# Altium PCB M2 PCB TX-RX.PcbDoc
Units mm, origin at the board's own origin, x right, y up, seen from the top; angles counter-clockwise.
Board outline 38.48 x 38.35 mm, 2 copper layers (Top Layer, Bottom Layer); 8 components, 8 nets, 26 pads, 0 vias.
Unrouted connection lines stored in the file: 2.
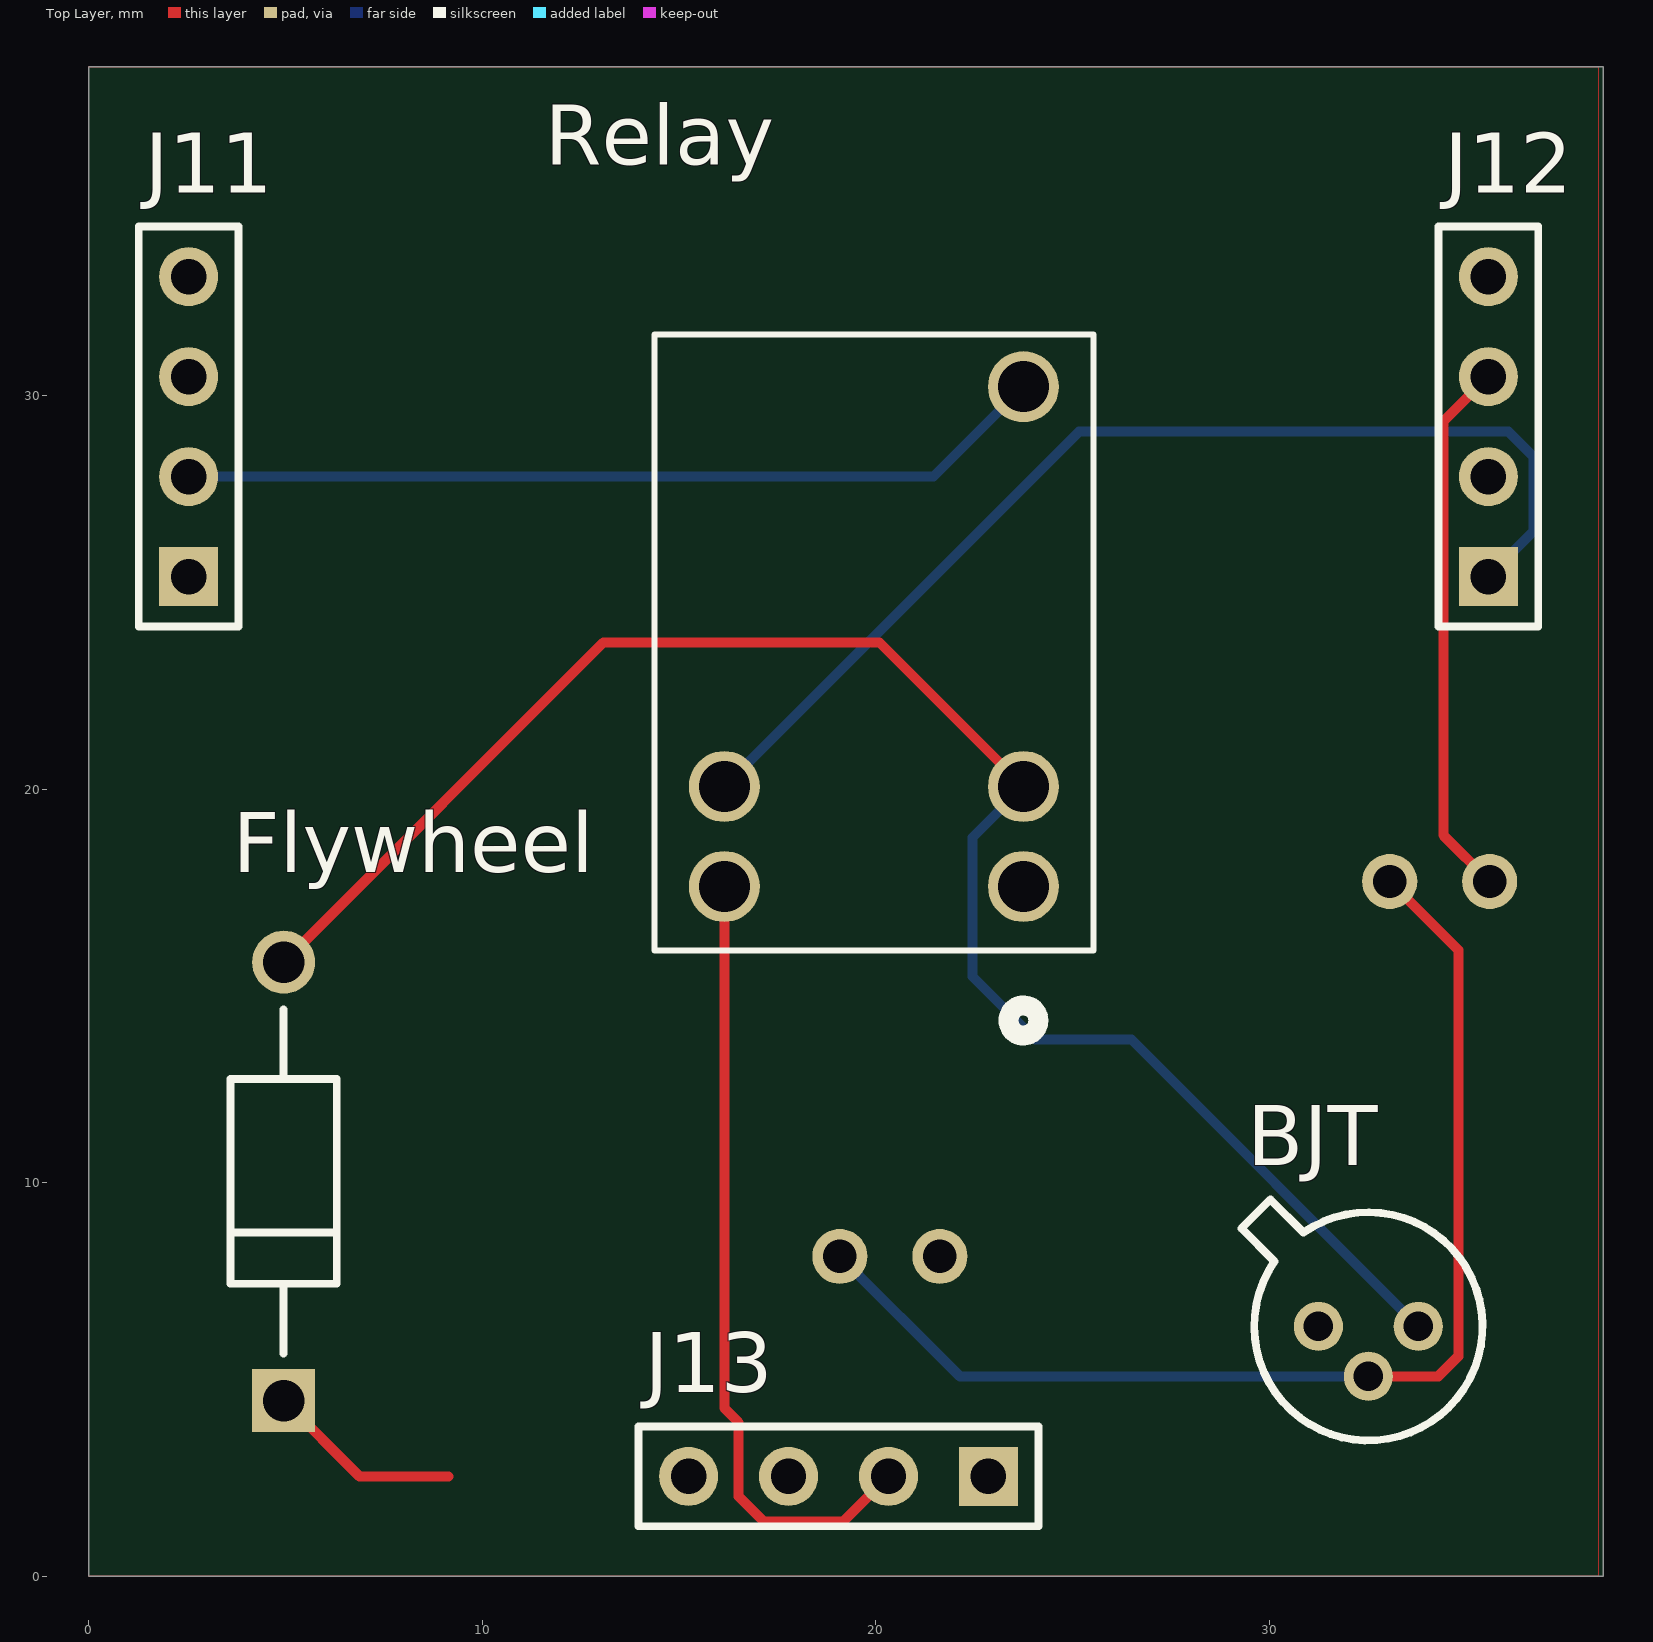
[diagram p0: Top Layer view]
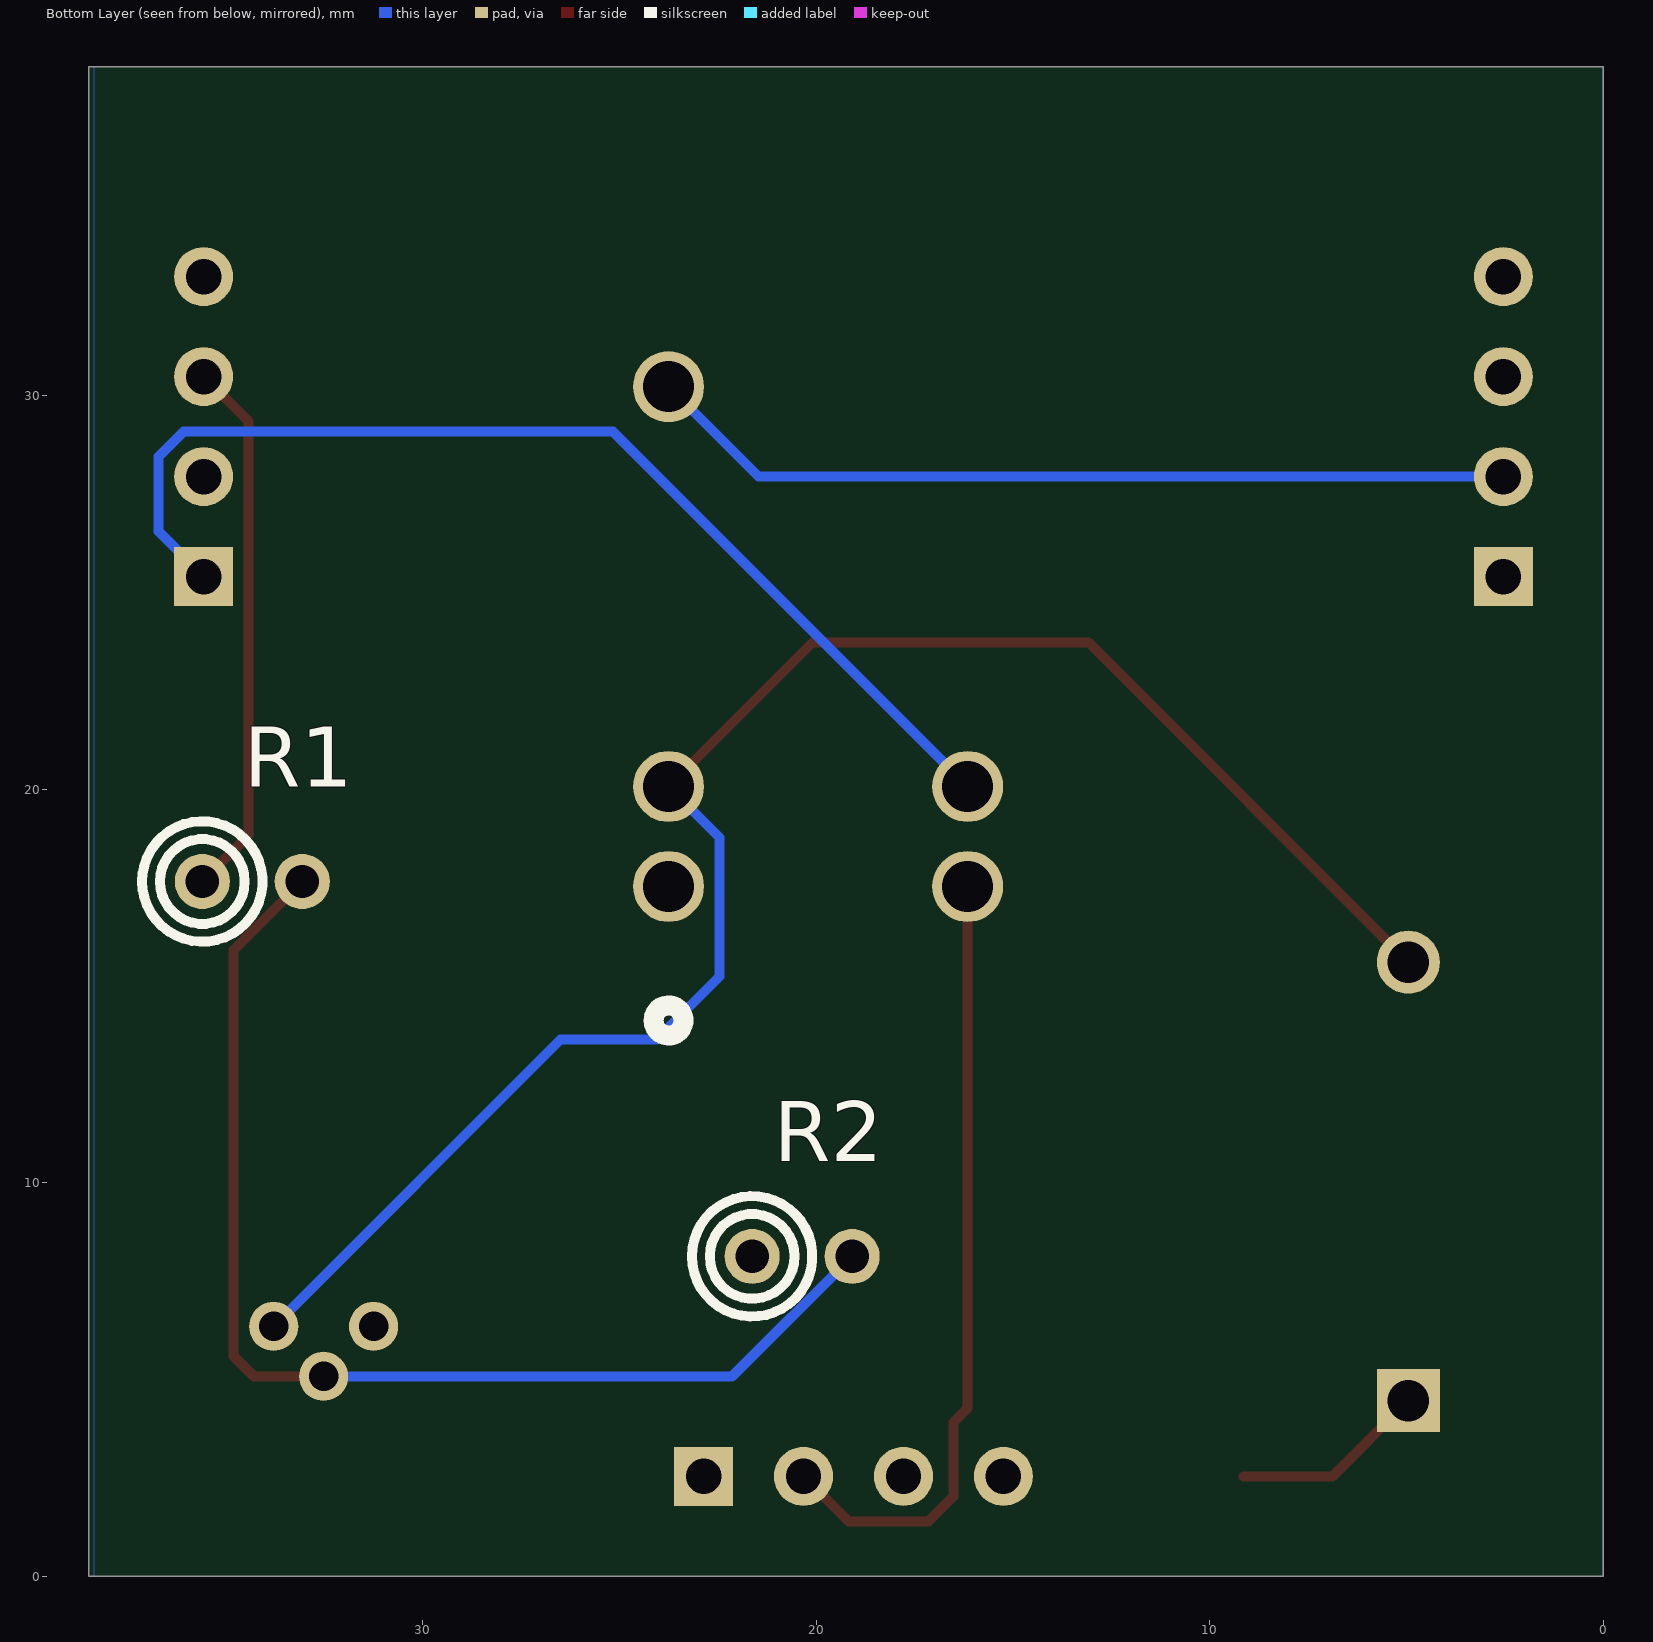
[diagram p1: Bottom Layer view, seen from below]

## Layer stack, top to bottom
Top Solder: solder mask 0.0102, Solder Resist, Dk 3.5
Top Layer: signal copper 0.0356
Dielectric 1: dielectric 0.32, FR-4, Dk 4.8
Bottom Layer: signal copper 0.0356
Bottom Solder: solder mask 0.0102, Solder Resist, Dk 3.5

## Board outline
0,0 38.481,0 38.481,38.354 0,38.354

## Design rules (kind name [scope] priority, off if disabled: settings)
Clearance [All] p1: gap=0.254 ignorepadtopadclearanceinfootprint=FALSE except(0: Arc-Hole Track-Hole SMDPad-Hole THPad-Hole Via-Hole Fill-Hole Poly-Hole Region-Hole Text-Hole)
HoleSize [All] p1: absolutevalues=TRUE maxlimit=22.86 minlimit=0.305 maxpercent=80.000 minpercent=20.000
MinimumSolderMaskSliver [All] p1: minsoldermaskwidth=0.025
PolygonConnect [All] p1: connectstyle=Relief reliefconductorwidth=0.254 reliefentries=4 polygonreliefangle="90 Angle" airgapwidth=0.254
RoutingVias [All] p1: holewidth=0.305 width=0.61 viastyle="Through Hole" minholewidth=0.305 minwidth=0.61 maxholewidth=2.54 maxwidth=5.08
SilkToSilkClearance [All] p1: silktosilkclearance=0
SilkToSolderMaskClearance [IsPad] p1: minsilkscreentomaskgap=0.025 clearancetoexposedcopper=TRUE
SolderMaskExpansion [All] p1: expansion=0.102 istentingtop=FALSE
Width [All] p1: maxlimit=5.08 minlimit=0.254 preferedwidth=0.254
26 further rules are at their usual default settings.

## Components (designator, comment, footprint, x,y, rotation, side; value= is the part's Value field where it differs from the comment)
BJT "2N2222A" STM-TO-18-3 32.512,6.35 r0 top
Flywheel "1N4001-TP" FP-DO-41-MFG 4.953,10.033 r90 top value=15pF
J11 "Header 4" HDR1X4 2.54,25.4 r90 top locked
J12 "Header 4" HDR1X4 35.56,25.4 r90 top locked
J13 "Header 4" HDR1X4 22.86,2.54 r180 top locked
R1 "Res1" AXIAL-0.1-RES 34.324,17.653 r180 bottom value=1K
R2 "Res1" AXIAL-0.1-RES 20.354,8.128 r180 bottom value=10K
Relay "7-1393779-2" RELAY_7-1393779-2 23.749,17.526 r90 top

## Footprints (in the part's own frame and the unit in brackets; to place one, negate y for a bottom-side part, rotate by r counter-clockwise, add the part's x,y. Pads: shape width x height; smd on the part's side, far side on the other; paste and mask are expansions set on the pad)
AXIAL-0.1-RES [mm] "Axial Device, Thru-Hole; 2 Leads; 0.3 in Pin Spacing"
  round 1.4 hole 0.85: 1(-1.27,0) 2(1.27,0)
  silkscreen extent -2.8,-1.53 0.26,1.53
FP-DO-41-MFG [mm]
  rect 1.6x1.6 hole 1.05 paste-1000 mask+0: 1(-5.57,0)
  round 1.6 hole 1.05 paste-1000 mask+0: 2(5.57,0)
  silkscreen extent -4.37,-1.35 4.37,1.35, body extent -6.47,-1.45 6.47,1.45, height 0.25
HDR1X4 [mm] "Connector; Header; 4 Position"
  rect 1.5x1.5 hole 0.9: 1(0,0)
  round 1.5 hole 0.9: 2(2.54,0) 3(5.08,0) 4(7.62,0)
  silkscreen extent -1.27,-1.27 8.89,1.27
RELAY_7-1393779-2 [mil]
  round 71 hole 51 mask+0: 1(0,299.21) 2(100,299.21) 7(500,0) 11(100,0) 12(0,0)
  silkscreen extent -149,-70 552,369, body extent 0,0 10,10, height 10
STM-TO-18-3 [mm] "TO, 3-Leads, Diameter 5.8mm"
  round 1.25 hole 0.75: 1(0,-1.27) 2(1.27,0) 3(-1.27,0)
  silkscreen extent -3.23,-2.9 2.9,3.23, body extent -3.23,-2.9 2.9,3.23, height 5.3

## Part data
BJT: library part CMP-2000-05381-1, "High Speed Switch, 0.6 A IC, -65 to 175 degC, 3-Pin TO-18, RoHS, Bulk", Case/Package=TO-18-3, Collector Base Voltage (VCBO)=75V, Collector Emitter Breakdown Voltage=40V, Collector Emitter Saturation Voltage=1V, Continuous Collector Current=600mA, DC Current Gain hFE=300hFE, Emitter Base Voltage (VEBO)=6V, Frequency=300MHz, Manufacturer=STMicroelectronics, Max Operating Temperature=175°C, Max Power Dissipation=400mW, Min Operating Temperature=-65°C, Operating Temperature Max=175degC, Package Description="3-Pin Through Hole Device, Dia 5.8 mm, Pitch 1.27 mm", Package Quantity=1000, Power Dissipation=500mW, Supplier Part Number 1=497-2598-ND, Transistor Case Style=TO-18, Automotive Qualification Standard=-, Category=BJTs, Collector Emitter Voltage (VCEO)=40V, Collector Emitter Voltage V(br)ceo=40V, Collector-emitter Voltage-Max=40V, ComponentLink1Description=https://datasheet.ciiva.com/25917/cd00003223-25917094.pdf?src-supplier=Avnet+Europe, ComponentLink1URL=https://datasheet.ciiva.com/25917/cd00003223-25917094.pdf?src-supplier=Avnet+Europe, ComponentLink2Description=https://datasheet.ciiva.com/15192/getdatasheetpartid-292165-15192875.pdf?src-supplier=Verical, ComponentLink2URL=https://datasheet.ciiva.com/15192/getdatasheetpartid-292165-15192875.pdf?src-supplier=Verical, ComponentLink3Description=https://datasheet.ciiva.com/14166/2n2222a-eng-tds-14166093.pdf?src-supplier=Distrelec, ComponentLink3URL=https://datasheet.ciiva.com/14166/2n2222a-eng-tds-14166093.pdf?src-supplier=Distrelec, ComponentLink4Description=https://datasheet.ciiva.com/16427/cd00003223-16427384.pdf?src-supplier=Future+Electronics, ComponentLink4URL=https://datasheet.ciiva.com/16427/cd00003223-16427384.pdf?src-supplier=Future+Electronics, ComponentLink5Description=https://datasheet.ciiva.com/977/cd00003223-977271.pdf?src-supplier=Digi-Key, ComponentLink5URL=https://datasheet.ciiva.com/977/cd00003223-977271.pdf?src-supplier=Digi-Key, ComponentLink6Description=https://datasheet.ciiva.com/1194/1449532-1194083.pdf?src-supplier=Element14, ComponentLink6URL=https://datasheet.ciiva.com/1194/1449532-1194083.pdf?src-supplier=Element14, ComponentLink7Description=https://datasheet.ciiva.com/29323/163147-da-01-en-transistor-2-n-2222-a-to18-stm-29323030.pdf?src-supplier=Conrad, ComponentLink7URL=https://datasheet.ciiva.com/29323/163147-da-01-en-transistor-2-n-2222-a-to18-stm-29323030.pdf?src-supplier=Conrad, Current Rating=600mA, Datasheet URL=https://datasheet.ciiva.com/25917/cd00003223-25917094.pdf, Datasheet Version=Feb-03, DC Collector Current=600mA, Element Configuration=Single, Gain Bandwidth Product=300MHz, Height=1.5mm, hFE Min=40, Lead Free="Contains Lead", Length=5.8mm, Manufacturer Part Number=2N2222A, Manufacturer URL=http://www.st.com/, Max Collector Current=600mA, Max Frequency=300MHz, Mount="Through Hole", No. of Pins=3Pins, Number of Elements=1, Number of Pins=3, Package Reference=TO-18-3, Packaging=Bulk, Polarity=NPN, Power Dissipation Pd=500mW, Product Range=-, Radiation Hardening=No, REACH SVHC="No SVHC", RoHS=Yes, RoHS Compliant=Yes, Series=2N2222, Supplier 1=Digi-Key, Transistor Polarity=NPN, Transition Frequency=300MHz, Transition Frequency ft=300MHz, Type=Switch, Voltage Rating (DC)=75V, Weight=0.012346oz, Width=5.8mm
Flywheel: library part CMP-56207-000001-1, "DIODE GEN PURP 50V 1A DO41", Average Rectified Current=1A, Capacitance=15pF, Case/Package=DO-41, Forward Voltage=1.1V, Manufacturer="Micro Commercial", Max Forward Surge Current (Ifsm)=30A, Max Junction Temp=+150°C, Max Operating Temperature=150°C, Max Repetitive Reverse Voltage=50V, Max Reverse Current=5uA, Min Operating Temperature=-55°C, Package Quantity=5000, Supplier Part Number 1=1N4001-TPMSTR-ND, Temperature="-55°C to +150°C", Automotive=No, Category=Diode, ComponentLink1Description=https://datasheet.ciiva.com/7624/1684824-7624692.pdf?src-supplier=Element14, ComponentLink1URL=https://datasheet.ciiva.com/7624/1684824-7624692.pdf?src-supplier=Element14, ComponentLink2Description=Datasheet, ComponentLink2URL=http://www.mccsemi.com/up_pdf/1N4001-1N4007(DO-41).pdf, ComponentLink3Description=https://datasheet.ciiva.com/911/1n4001-1n4007do-41-911653.pdf?src-supplier=Digi-Key, ComponentLink3URL=https://datasheet.ciiva.com/911/1n4001-1n4007do-41-911653.pdf?src-supplier=Digi-Key, ComponentLink4Description=https://datasheet.ciiva.com/911/1n4001-1n4007do-41-911654.pdf?src-supplier=Digi-Key, ComponentLink4URL=https://datasheet.ciiva.com/911/1n4001-1n4007do-41-911654.pdf?src-supplier=Digi-Key, ComponentLink5Description=https://datasheet.ciiva.com/14557/70055511-14557706.pdf?src-supplier=Allied+Electronics, ComponentLink5URL=https://datasheet.ciiva.com/14557/70055511-14557706.pdf?src-supplier=Allied+Electronics, ComponentLink6Description=https://datasheet.ciiva.com/16747/1n4001-1n4007do-41-16747013.pdf?src-supplier=Future+Electronics, ComponentLink6URL=https://datasheet.ciiva.com/16747/1n4001-1n4007do-41-16747013.pdf?src-supplier=Future+Electronics, ComponentLink7Description=https://datasheet.ciiva.com/28381/1684824-28381848.pdf?src-supplier=Element14, ComponentLink7URL=https://datasheet.ciiva.com/28381/1684824-28381848.pdf?src-supplier=Element14, Current Rating=1A, Device Class L1="Discrete Semiconductors", Device Class L2=Diodes, Device Class L3="Rectifier Diodes", Diameter=2.7mm, Digikey Description="DIODE GEN PURP 50V 1A DO41", Element Configuration=Single, Forward Current=1A, Height=2.7mm, Ipc Land Pattern Name=DIOPA1114W105L520D270, Lead Free=Yes, Length=5.2mm, Manufacturer Part Number=1N4001-TP, Max Repetitive Reverse Voltage (Vrrm)=50V, Max Reverse Voltage (DC)=50V, Max Surge Current=30A, Max Surge Forward Current=30A, Mount="Through Hole", Mouser Description="Rectifiers Vr/50V Io/1A", Number of Pins=2, Octopart=https://octopart.com/1n4001-tp-mcc-730241, Output Current=1A, Package=DO-41, Packaging="Tape and Reel", Peak Non-Repetitive Surge Current=30A, Peak Reverse Current=5uA, Polarity=Standard, Pricing 1="5000=0.03520, 10000=0.02992, 25000=0.02816, 50000=0.02640, 125000=0.02400 (USD)", Radiation Hardening=No, REACH SVHC=Unknown, Recovery Time=2000ns, Reverse Recovery Time=2us, Reverse Voltage=50V, RoHS=TRUE, RoHS Compliant=Yes, Supplier 1=Digi-Key, Temperature Range High=+150°C, Temperature Range Low=-55°C, Voltage Rating (DC)=50V
J11 J12 J13: "Conn Header Vert 4POS 2.54MM", Color=Black, Manufacturer=Sullins, Manufacturer Part Number=PRPC004SAAN-RC, Package Quantity=1, Supplier Part Number 1=S1011EC-04-ND, Category=Connectors, ComponentLink1Description=https://datasheet.ciiva.com/741/xrxczzzsxxn-rc-st-11635-b-741241.pdf?src-supplier=Digi-Key, ComponentLink1URL=https://datasheet.ciiva.com/741/xrxczzzsxxn-rc-st-11635-b-741241.pdf?src-supplier=Digi-Key, Connector Type="Male Pin", Contact Mating Length=0.23inch, Contact Plating=Gold, Contact Type="Male Pin", LatestRevisionDate=17-Jul-2002, LatestRevisionNote="Re-released for DXP Platform.", Mount="Through Hole", Number of Positions=4, Number of Rows=1, Packaging=Bulk, Pitch=0.1inch, Pricing 1="1=0.15000, 10=0.14600, 25=0.10840, 50=0.09280, 100=0.08980, 250=0.07740, 500=0.07430 (USD)", Publisher="Altium Limited", RoHS=Yes, RoHS Compliant=Yes, Series=-, Stock 1=11461, Supplier 1=Digi-Key, Termination=Solder
R1: library part "RES 1K OHM 5% 1/4W AXIAL", "Resistor", Manufacturer Part Number=CFR-25JB-52-1K, Power Rating=1/4W, Tolerance=0.05, LatestRevisionDate=17-Jul-2002, LatestRevisionNote="Re-released for DXP Platform.", Published=8-Jun-2000, Publisher="Altium Limited"
R2: library part "RES 10K OHM 5% 1/4W AXIAL", "Resistor", Manufacturer Part Number=CFR-25JB-52-10K, Power Rating=1/4W, Tolerance=0.05, LatestRevisionDate=17-Jul-2002, LatestRevisionNote="Re-released for DXP Platform.", Published=8-Jun-2000, Publisher="Altium Limited"
Relay: "No Description Available", Mfr_Name="TE Connectivity", Copyright="Copyright (C) 2022 Ultra Librarian. All rights reserved.", Manufacturer_Part_Number=7-1393779-2, RefDes=RefDes, Type=DEV

## Nets (pads, with @x,y where several pads share a name; then routed paths per layer and width w, separated by ;. In a path a pad name is that pad's centre, name@x,y a point inside that pad or via, vN(x,y) a via of type N, cw(c..) or ccw(c..) an arc to the next point about the centre after c; other vN are vias at no path point)
"+5 V": Flywheel.1 J12.2 | length 5
  Top Layer w0.254: Flywheel.1 6.876,2.54 9.144,2.54
/TXEN: J12.3 R1.1 | length 13.8
  Top Layer w0.254: J12.3 34.417,29.337 34.417,18.83 R1.1
ANT: J11.1 J11.2 Relay.7 | length 22.2
  Bottom Layer w0.254: J11.2 21.463,27.94 Relay.7
GND: BJT.3 J11.3 J11.4 J12.4 J13.3 J13.4 R2.1
NetBJT_1: BJT.1 R1.2 R2.2 | length 30
  Top Layer w0.254: BJT.1 34.29,5.08 34.798,5.588 34.798,15.909 R1.2
  Bottom Layer w0.254: R2.2 22.132,5.08 BJT.1
NetBJT_2: BJT.2 Flywheel.2 Relay.11 | length 44
  Top Layer w0.254: Flywheel.2 13.074,23.724 20.091,23.724 Relay.11
  Bottom Layer w0.254: Relay.11 22.454,18.771 22.454,15.24 24.054,13.64 26.492,13.64 BJT.2
PA_OUT: J13.1 J13.2 Relay.1 | length 20.2
  Top Layer w0.254: Relay.1 16.149,4.273 16.51,3.912 16.51,2.032 17.145,1.397 19.177,1.397 J13.2
RX_SIG: J12.1 Relay.2 | length 28.1
  Bottom Layer w0.254: Relay.2 25.166,29.083 36.068,29.083 36.703,28.448 36.703,26.543 J12.1
pads on no net: Relay.12

## Polygon pours and split planes (outlines as drawn)
no net on Bottom Layer "NONET_L02_P000" (solid, pour order 0): 0,38.354 38.354,38.354 38.354,0 0,0
no net on Top Layer "NONET_L01_P001" (solid, pour order 1): 0,38.354 38.354,38.354 38.354,0 0,0